# Altium PCB AS5048A-breakout.PcbDoc
Units mm, origin at the board's own origin, x right, y up, seen from the top; angles counter-clockwise.
Board outline 28.7 x 18.29 mm, 2 copper layers (Top Layer, Bottom Layer); 3 components, 14 nets, 28 pads, 0 vias.
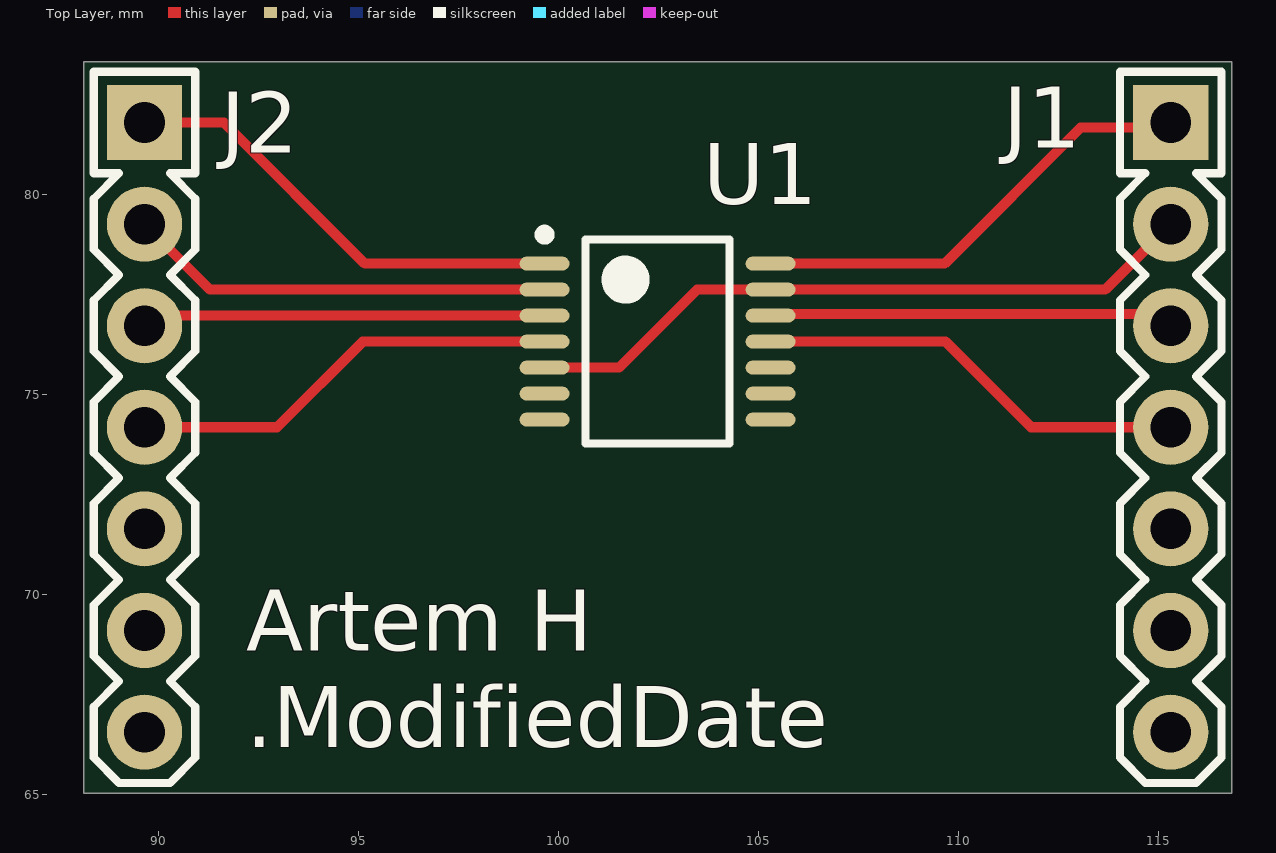
[diagram p0: Top Layer view]
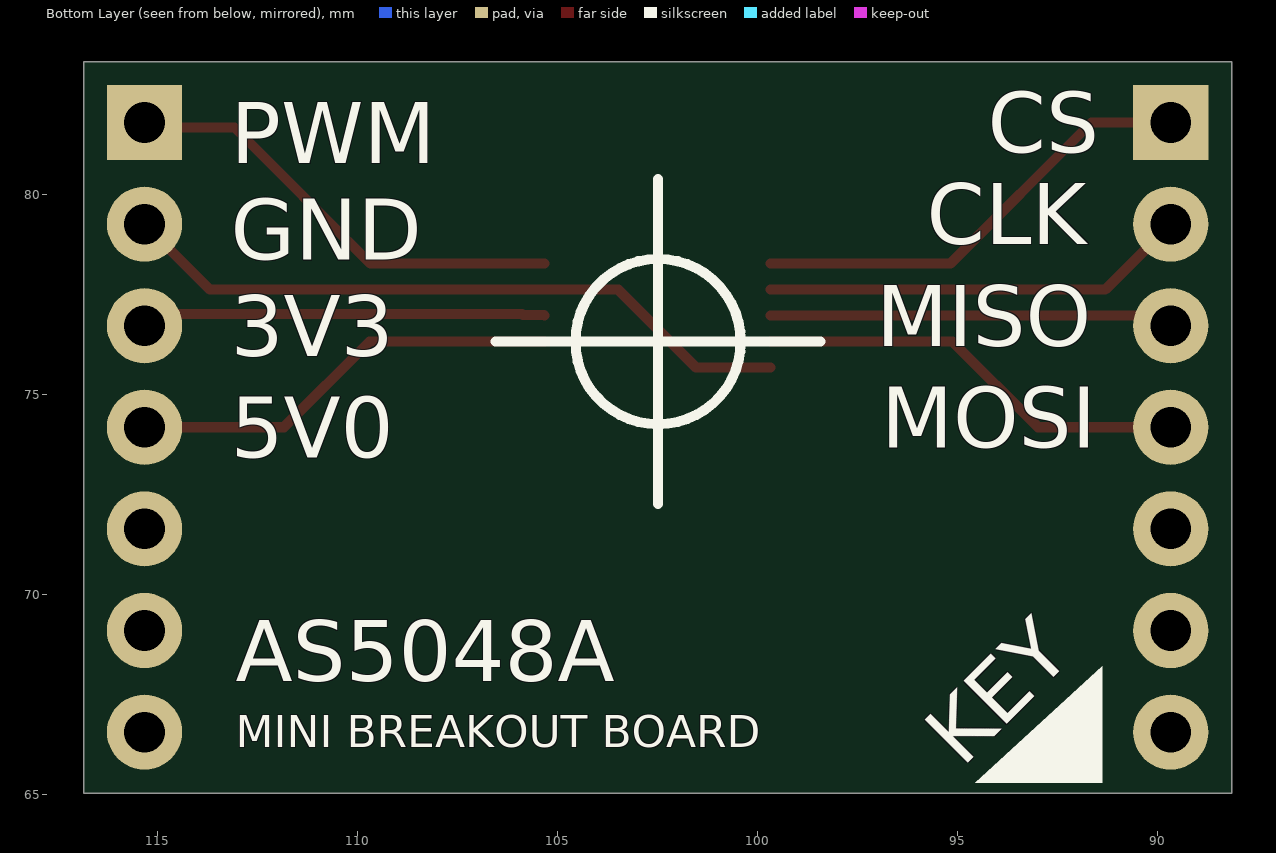
[diagram p1: Bottom Layer view, seen from below]

## Layer stack, top to bottom
Top Solder: solder mask 0.0102, Solder Resist, Dk 3.5
Top Layer: signal copper 0.0356
Dielectric 1: dielectric 0.32, FR-4, Dk 4.8
Bottom Layer: signal copper 0.0356
Bottom Solder: solder mask 0.0102, Solder Resist, Dk 3.5

## Board outline
88.138,65.024 88.138,83.312 116.84,83.312 116.84,65.024

## Design rules (kind name [scope] priority, off if disabled: settings)
Clearance [All] p1: gap=0.254 ignorepadtopadclearanceinfootprint=FALSE
PolygonConnect [All] p1: connectstyle=Relief reliefconductorwidth=0.254 reliefentries=4 polygonreliefangle="90 Angle" airgapwidth=0.254
RoutingVias [All] p1: holewidth=0.711 width=1.27 viastyle="Through Hole" minholewidth=0.711 minwidth=1.27 maxholewidth=0.711 maxwidth=1.27
SolderMaskExpansion [All] p1: expansion=0.102 istentingtop=FALSE
Width [All] p1: maxlimit=0.254 minlimit=0.254 preferedwidth=0.254
30 further rules are at their usual default settings.

## Components (designator, comment, footprint, x,y, rotation, side; value= is the part's Value field where it differs from the comment)
J1 "PPPC071LFBN-RC" 1X07-PIN 115.316,81.788 r270 top
J2 "PPPC071LFBN-RC" 1X07-PIN 89.662,81.788 r270 top
U1 "AS5048A-HTSP" AMS-TSSOP-14-5000X4400DE_L 102.489,76.31 r0 top

## Footprints (in the part's own frame and the unit in brackets; to place one, negate y for a bottom-side part, rotate by r counter-clockwise, add the part's x,y. Pads: shape width x height; smd on the part's side, far side on the other; paste and mask are expansions set on the pad)
1X07-PIN [mil]
  rect 74x74 / inner round 74 / far side rect 74x74 hole 40: 1(0,0)
  round 74 hole 40: 2(100,0) 3(200,0) 4(300,0) 5(400,0) 6(500,0) 7(600,0)
  silkscreen extent -50,-50 650,50
AMS-TSSOP-14-5000X4400DE_L [mm] "TSOP, 14-Leads, Body 5.00x4.40mm, Pitch 0.65mm, IPC High Density"
  oval 1.25x0.35 smd: 1(-2.825,1.95) 2(-2.825,1.3) 3(-2.825,0.65) 4(-2.825,0) 5(-2.825,-0.65) 6(-2.825,-1.3) 7(-2.825,-1.95) 8(2.825,-1.95) 9(2.825,-1.3) 10(2.825,-0.65) 11(2.825,0) 12(2.825,0.65) 13(2.825,1.3) 14(2.825,1.95)
  silkscreen extent -2.95,-2.55 1.8,2.8, body extent -2.25,-2.55 2.25,2.55, height 1.2

## Part data
J1 J2: library part CMP-002-00071-1, "7 Position Header Connector 0.100 (2.54mm) Through Hole Gold", Case/Package=None, Availability="In Stock", Check_prices=https://www.snapeda.com/parts/PPPC071LFBN-RC/Sullins+Connector+Solutions/view-part/?ref=eda, Component Type=Standard, Design Item ID=PPPC071LFBN-RC, MF="Sullins Connector", MP=PPPC071LFBN-RC, Pins=7, Price=None, Purchase-URL=https://pricing.snapeda.com/search?q=PPPC071LFBN-RC&ref=eda, SnapEDA_Link=https://www.snapeda.com/parts/PPPC071LFBN-RC/Sullins+Connector+Solutions/view-part/?ref=snap, Source=PPPC071LFBN-RC.SchLib
U1: library part CMP-0555-00034-2, "Magnetic Rotary Encoder 14-bit Angular Position Sensor, 3.3 or 5 V, TSSOP-14, Pb-Free, Reel", Manufacturer=AMS, Supply Voltage (V)="3.3 or 5.0", Code_JEDEC=MO-153, ComponentLink1Description="Manufacturer URL", ComponentLink1URL=www.ams.com, ComponentLink2Description=Datasheet, ComponentLink2URL=http://www.ams.com/eng/content/download/438523/1341157/143015, DatasheetVersion="Rev. 1.3", Features="SPI, PWM, In System Programmable", Mounting Technology="Surface Mount", Output="SPI, PWM", PackageDescription="14-Pin Small Outline Package, 5 x 4.4 mm Body, 0.65 mm Pitch", PackageReference=TSSOP-14, PackageVersion="Rev. 2.7, 10/2010", PartNumber=AS5048A-HTSP, Resolution=14-bit

## Nets (pads, with @x,y where several pads share a name; then routed paths per layer and width w, separated by ;. In a path a pad name is that pad's centre, name@x,y a point inside that pad or via, vN(x,y) a via of type N, cw(c..) or ccw(c..) an arc to the next point about the centre after c; other vN are vias at no path point)
3V3_0: J1.3 U1.12 | length 10.1
  Top Layer w0.254: U1.12 105.332,76.978 105.85,76.978 105.875,77.003 115.021,77.003 J1.3
+5_0: J1.4 U1.11 | length 10.9
  Top Layer w0.254: U1.11 109.69,76.31 111.832,74.168 J1.4
CLK: J2.2 U1.2 | length 11.1
  Top Layer w0.254: J2.2@90.102,79.248 J2.2 91.3,77.61 U1.2
CS: J2.1 U1.1 | length 11.5
  Top Layer w0.254: J2.1 91.643,81.788 95.171,78.26 U1.1
GND: J1.2 U1.5 U1.13 | length 17.6
  Top Layer w0.254: U1.5 101.523,75.66 103.473,77.61 U1.13 113.678,77.61 J1.2 J1.2@114.876,79.248
MISO: J2.3 U1.3 | length 10.1
  Top Layer w0.254: J2.3 89.916,76.962 U1.3@99.661,76.962
MOSI: J2.4 U1.4 | length 10.9
  Top Layer w0.254: J2.4 92.975,74.168 95.117,76.31 U1.4
NC1: J1.5
NC2: J1.6
NC3: J1.7
NC4: J2.5
NC5: J2.6
NC6: J2.7
PWM: J1.1 U1.14 | length 11.4
  Top Layer w0.254: U1.14 109.666,78.26 113.067,81.661 J1.1@115.316,81.661
pads on no net: U1.6 U1.7 U1.8 U1.9 U1.10

## Silkscreen, mask and mechanical layers (free items; w line width, h text height)
Top Overlay:
  text "Artem H" at 92.202,68.58 h1.52
  text ".ModifiedDate" at 92.202,66.167 h1.52
Bottom Overlay:
  circle w0.254: c102.476,76.311 r2.067
  region: 94.551,65.278 91.376,65.278 91.376,68.199
  lines w0.254: 98.412,76.311 102.476,76.311 ; 102.476,72.247 102.476,76.311 ; 102.476,80.375 102.476,76.311 ; 106.54,76.311 102.476,76.311
  text "CS" at 94.234,81.026 h1.52
  text "PWM" at 113.157,80.772 h1.52
  text "CLK" at 95.758,78.74 h1.52
  text "GND" at 113.157,78.359 h1.52
  text "MISO" at 97.028,76.2 h1.52
  text "3V3" at 113.157,75.946 h1.52
  text "MOSI" at 96.901,73.66 h1.52
  text "5V0" at 113.157,73.406 h1.52
  text "AS5048A" at 113.03,67.818 h1.52
  text "MINI BREAKOUT BOARD" at 113.03,66.167 h0.8
  text "KEY" at 94.869,65.637 h1.52 r315
Mechanical 1:
  the board outline again, w0.254